# EAGLE board bbb-cc2520_b (EAGLE 6.6.0)
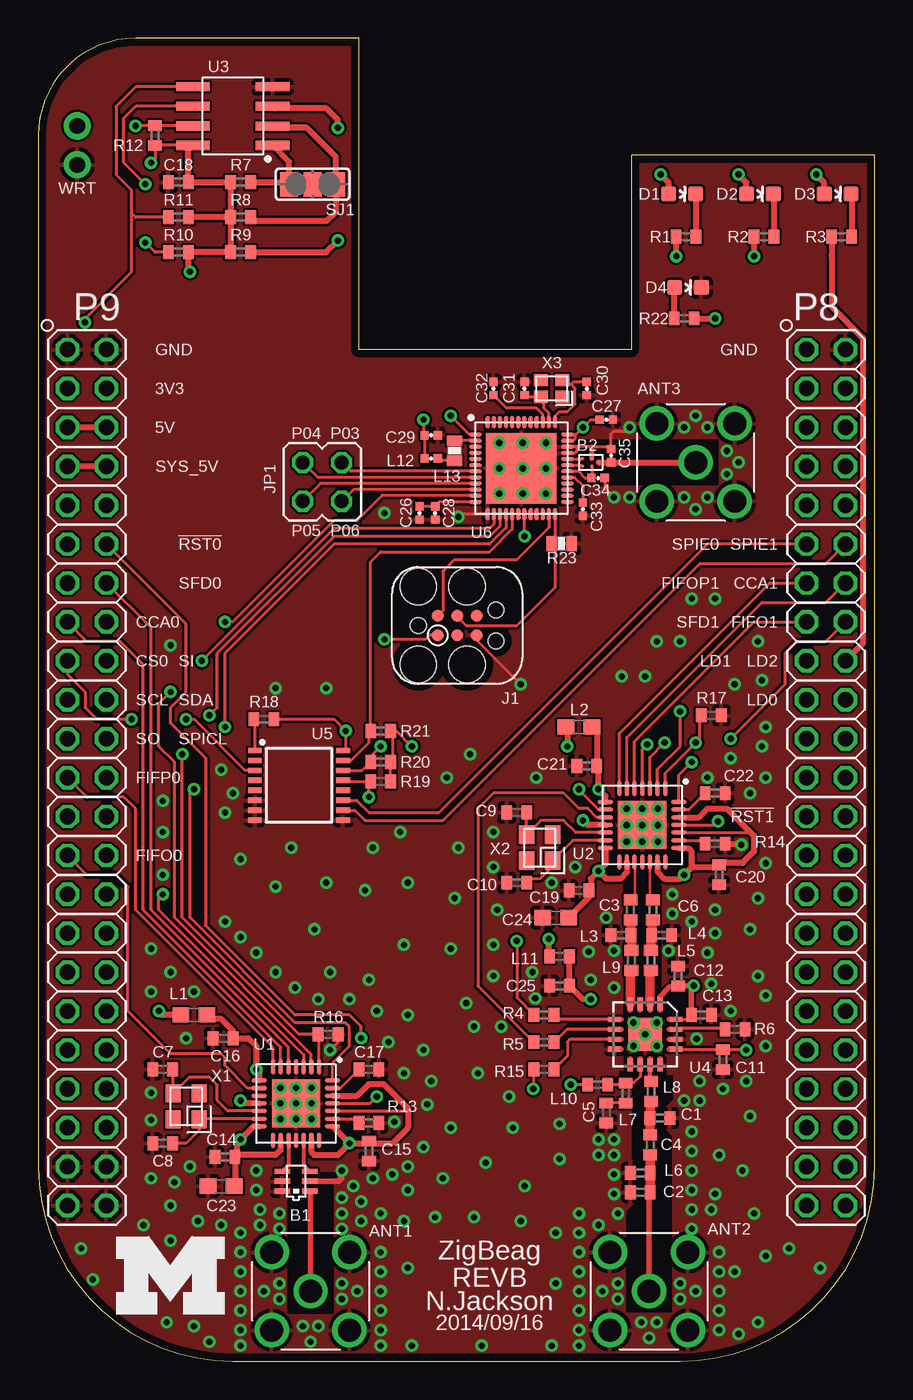
[diagram p0: board, top side]
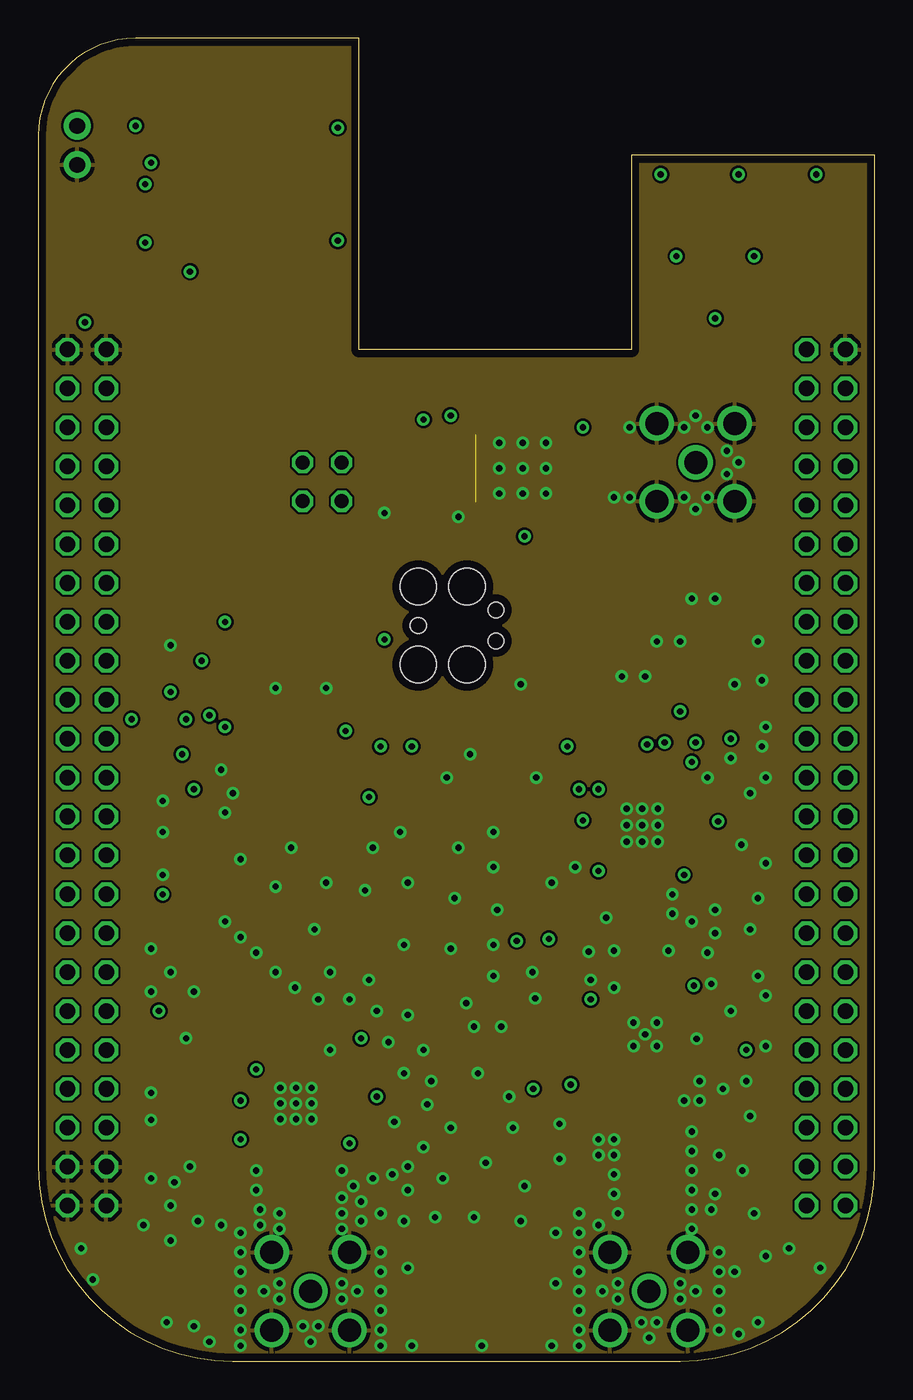
[diagram p1: board, inner layer GND]
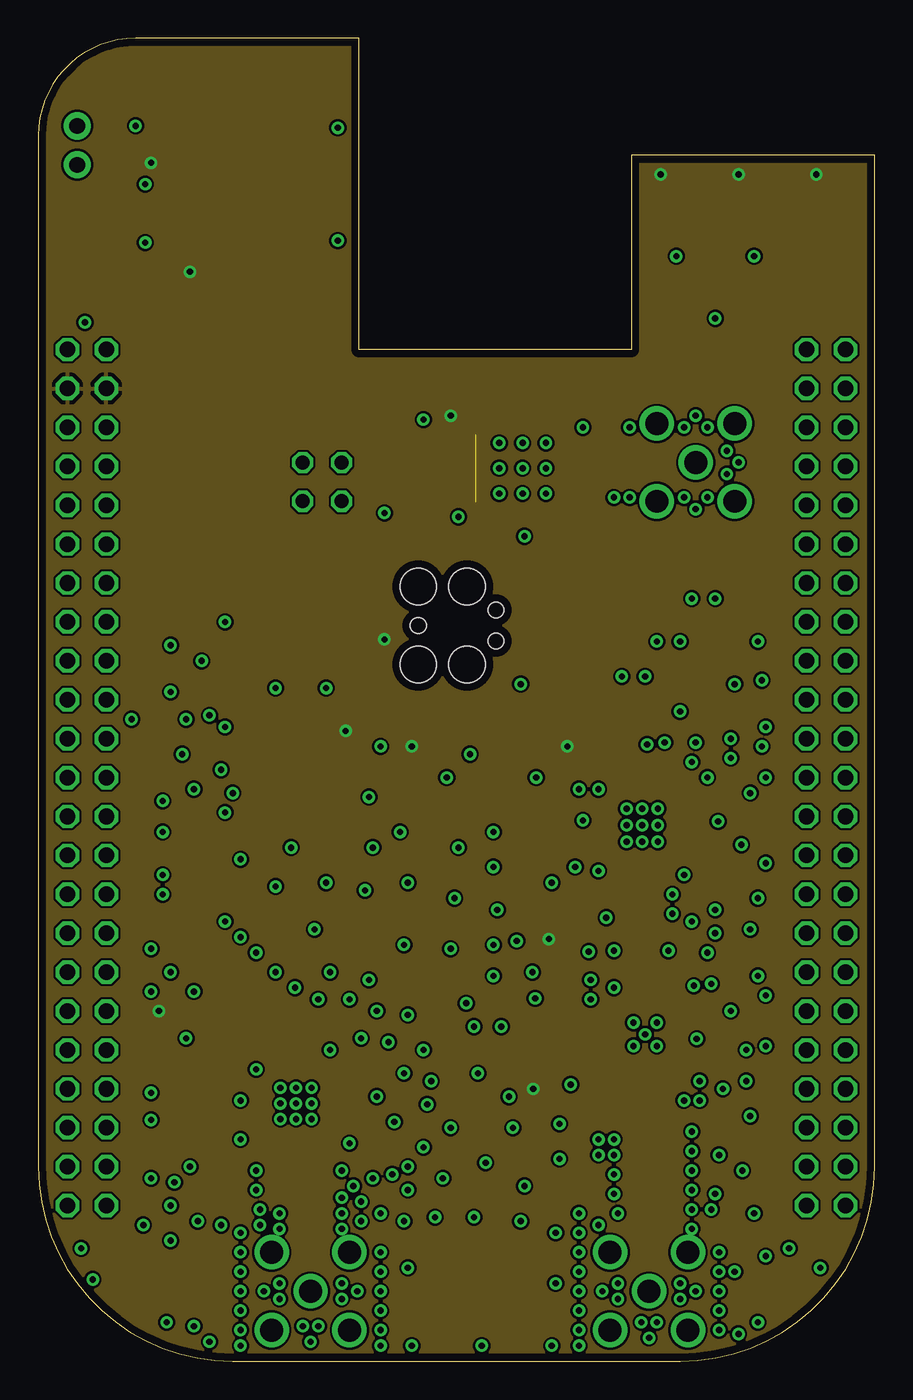
[diagram p2: board, inner layer VCC]
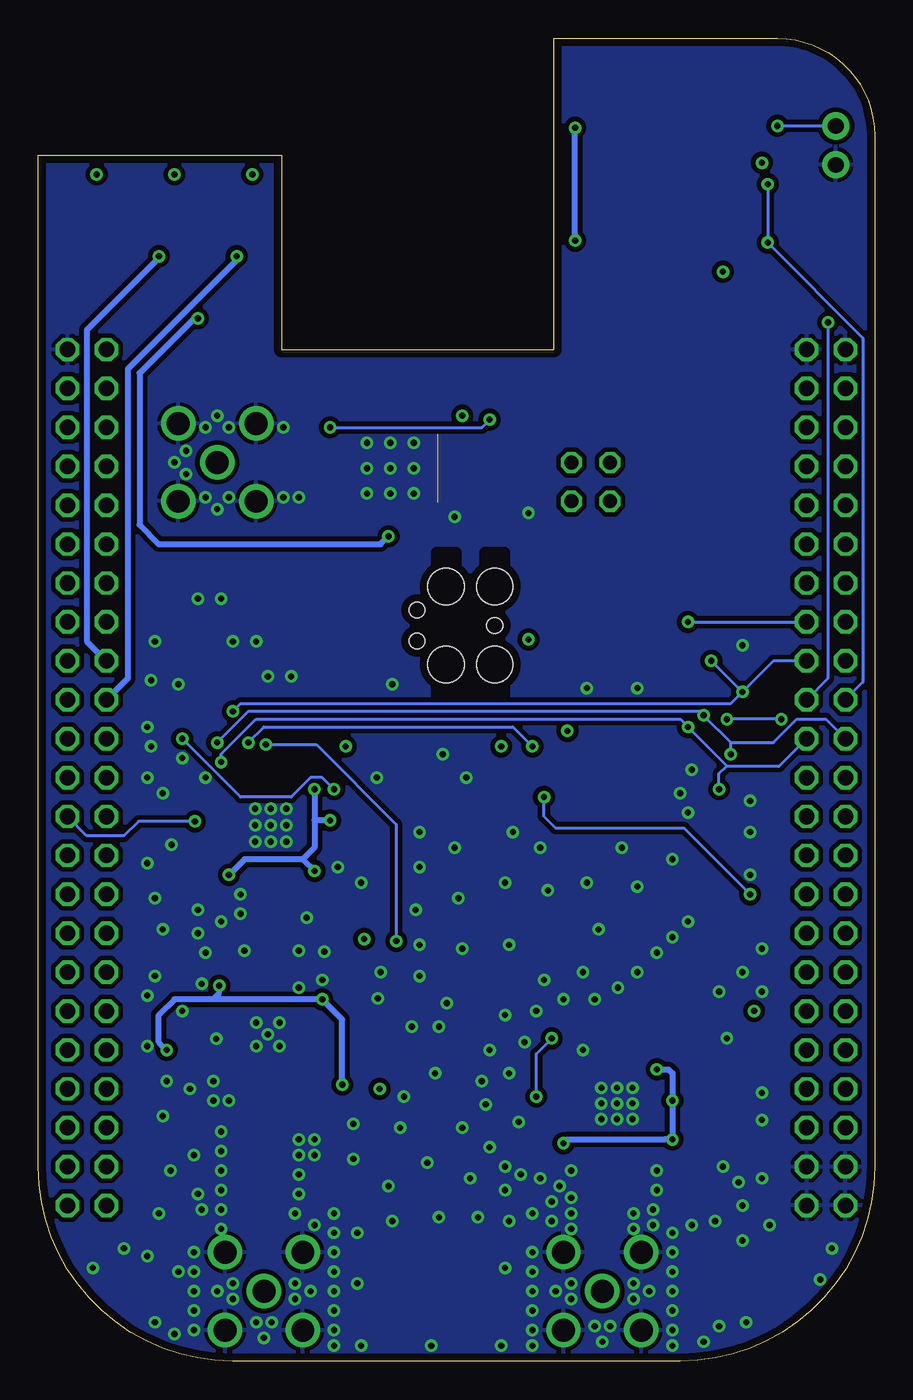
[diagram p3: board, bottom side, seen from below]

Size 54.61 x 86.36 mm. Coordinates in mm from the lower left corner, seen from the top.
Outline: 20.95,86.36 6.35,86.36 arc90 0,80.01 0,12.7 arc90 12.7,0 41.91,0 arc90 54.61,12.7 54.61,78.74 38.73,78.74 38.73,66.04 20.95,66.04 20.95,86.36
Copper layers (1+2*15+16): Top 0.0178mm / dielectric 12mil / GND 0.0356mm / dielectric 28mil / VCC 0.0356mm / dielectric 12mil / Bottom 0.0178mm
Design rules "sunstone-4lyr_v1.0.0.3 *": minimum track width 6mil, minimum drill 8mil, track to track 6mil, track to pad 6mil, pad to pad 6mil, via to via 6mil, smd to smd 6mil, copper to edge 20mil, drill to drill 16mil, minimum pad ring 8mil, minimum via ring 8mil, stop-mask expansion 3mil, vias tented up to drill 25mil, thermal gap 10mil

## Footprints (pad centres in the part's own frame; a part is rotated, then mirrored left to right if it is on the bottom)
MOLEX_WM5544-ND = drill 1.499: GND1 0,5.08; GND2 5.08,5.08; GND3 0,0; GND4 5.08,0; SIGNAL 2.54,2.54
2450BM = smd 0.35 x 1: 1 0.65,0.9; 2 0,0.9; 3 -0.65,0.9; 4 -0.65,-0.9; 5 0,-0.9; 6 0.65,-0.9
BAL-NRF01D3 = smd 0.22 x 0.22: ANT1 -0.537,-0.25; ANT2 -0.537,0.25; GND 0.069,0.25; SE 0.537,0; VCC 0.069,-0.25
C0402 = smd 0.7 x 0.9: 1 -0.65,0; 2 0.65,0
C0603 = smd 1.1 x 1: 1 -0.85,0; 2 0.85,0
0402_CAP = smd 0.536 x 0.546: 1 -0.433,0; 2 0.433,0
LED-0603 = smd 1 x 1: A 0,-0.877; C 0,0.877
TC2030-IDC = smd 0.787 x 0.787: 1 -1.27,-0.635; 2 -1.27,0.635; 3 0,-0.635; 4 0,0.635; 5 1.27,-0.635; 6 1.27,0.635 | hole 2.375: -2.54,2.54; 0.635,2.54; 0.635,-2.54; -2.54,-2.54 | hole 1.016: -2.54,0; 2.54,1.016; 2.54,-1.016
JP2Q = drill 0.914 octagon: 1 -1.27,-1.27; 2 1.27,-1.27; 3 -1.27,1.27; 4 1.27,1.27
0603 = smd 1.1 x 1: 1 -0.85,0; 2 0.85,0
0603_CAP = smd 0.7 x 1: 1 -0.65,0; 2 0.65,0
BBB_HEADERS = drill 1.016 octagon: P8_1 49.53,57.15; P8_2 52.07,57.15; P8_3 49.53,54.61; P8_4 52.07,54.61; P8_5 49.53,52.07; P8_6 52.07,52.07; P8_7 49.53,49.53; P8_8 52.07,49.53; P8_9 49.53,46.99; P8_10 52.07,46.99; P8_11 49.53,44.45; P8_12 52.07,44.45; P8_13 49.53,41.91; P8_14 52.07,41.91; P8_15 49.53,39.37; P8_16 52.07,39.37; P8_17 49.53,36.83; P8_18 52.07,36.83; P8_19 49.53,34.29; P8_20 52.07,34.29; P8_21 49.53,31.75; P8_22 52.07,31.75; P8_23 49.53,29.21; P8_24 52.07,29.21; P8_25 49.53,26.67; P8_26 52.07,26.67; P8_27 49.53,24.13; P8_28 52.07,24.13; P8_29 49.53,21.59; P8_30 52.07,21.59; P8_31 49.53,19.05; P8_32 52.07,19.05; P8_33 49.53,16.51; P8_34 52.07,16.51; P8_35 49.53,13.97; P8_36 52.07,13.97; P8_37 49.53,11.43; P8_38 52.07,11.43; P8_39 49.53,8.89; P8_40 52.07,8.89; P8_41 49.53,6.35; P8_42 52.07,6.35; P8_43 49.53,3.81; P8_44 52.07,3.81; P8_45 49.53,1.27; P8_46 52.07,1.27; P9_1 1.27,57.15; P9_2 3.81,57.15; P9_3 1.27,54.61; P9_4 3.81,54.61; P9_5 1.27,52.07; P9_6 3.81,52.07; P9_7 1.27,49.53; P9_8 3.81,49.53; P9_9 1.27,46.99; P9_10 3.81,46.99; P9_11 1.27,44.45; P9_12 3.81,44.45; P9_13 1.27,41.91; P9_14 3.81,41.91; P9_15 1.27,39.37; P9_16 3.81,39.37; P9_17 1.27,36.83; P9_18 3.81,36.83; P9_19 1.27,34.29; P9_20 3.81,34.29; P9_21 1.27,31.75; P9_22 3.81,31.75; P9_23 1.27,29.21; P9_24 3.81,29.21; P9_25 1.27,26.67; P9_26 3.81,26.67; P9_27 1.27,24.13; P9_28 3.81,24.13; P9_29 1.27,21.59; P9_30 3.81,21.59; P9_31 1.27,19.05; P9_32 3.81,19.05; P9_33 1.27,16.51; P9_34 3.81,16.51; P9_35 1.27,13.97; P9_36 3.81,13.97; P9_37 1.27,11.43; P9_38 3.81,11.43; P9_39 1.27,8.89; P9_40 3.81,8.89; P9_41 1.27,6.35; P9_42 3.81,6.35; P9_43 1.27,3.81; P9_44 3.81,3.81; P9_45 1.27,1.27; P9_46 3.81,1.27
R0402 = smd 0.7 x 0.9: 1 -0.65,0; 2 0.65,0
0603-RES = smd 0.7 x 1: 1 -0.65,0; 2 0.65,0
PAD-JUMPER-3-NO_YES_SILK_FULL_BOX = smd 1.168 x 1.6: 1 -1.524,0; 2 0,0; 3 1.524,0
S-PVQFN-N28 = smd 1 x 0.28: 1 -2.4,1.5; 2 -2.4,1; 3 -2.4,0.5; 4 -2.4,0; 5 -2.4,-0.5; 6 -2.4,-1; 7 -2.4,-1.5; 15 2.4,-1.5; 16 2.4,-1; 17 2.4,-0.5; 18 2.4,0; 19 2.4,0.5; 20 2.4,1; 21 2.4,1.5 | smd 0.28 x 1: 8 -1.5,-2.4; 9 -1,-2.4; 10 -0.5,-2.4; 11 0,-2.4; 12 0.5,-2.4; 13 1,-2.4; 14 1.5,-2.4; 22 1.5,2.4; 23 1,2.4; 24 0.5,2.4; 25 0,2.4; 26 -0.5,2.4; 27 -1,2.4; 28 -1.5,2.4 | smd 3.15 x 3.15: THERMALPAD 0,0
CAT24C256WI-GT3 = smd 2.2 x 0.6: A0 -2.6,1.91; A1 -2.6,0.65; A2 -2.6,-0.64; SCL 2.6,-0.64; SDA 2.6,-1.91; VCC 2.6,1.91; VSS -2.6,-1.91; WP 2.6,0.64
PVQFN-16 = smd 0.35 x 0.825: 1 -0.975,-2.013; 2 -0.325,-2.013; 3 0.325,-2.013; 4 0.975,-2.013; 9 0.975,2.013; 10 0.325,2.013; 11 -0.325,2.013; 12 -0.975,2.013 | smd 0.825 x 0.35: 5 2.013,-0.975; 6 2.013,-0.325; 7 2.013,0.325; 8 2.013,0.975; 13 -2.013,0.975; 14 -2.013,0.325; 15 -2.013,-0.325; 16 -2.013,-0.975 | smd 2.16 x 2.16: PAD 0,0
TSSOP16 = smd 0.9 x 0.35: 1 -2.875,2.275; 2 -2.875,1.625; 3 -2.875,0.975; 4 -2.875,0.325; 5 -2.875,-0.325; 6 -2.875,-0.975; 7 -2.875,-1.625; 8 -2.875,-2.275; 9 2.875,-2.275; 10 2.875,-1.625; 11 2.875,-0.975; 12 2.875,-0.325; 13 2.875,0.325; 14 2.875,0.975; 15 2.875,1.625; 16 2.875,2.275
QFN-48-6MM = smd 0.8 x 0.25: 1 -3,2.2; 2 -3,1.8; 3 -3,1.4; 4 -3,1; 5 -3,0.6; 6 -3,0.2; 7 -3,-0.2; 8 -3,-0.6; 9 -3,-1; 10 -3,-1.4; 11 -3,-1.8; 12 -3,-2.2; 25 3,-2.2; 26 3,-1.8; 27 3,-1.4; 28 3,-1; 29 3,-0.6; 30 3,-0.2; 31 3,0.2; 32 3,0.6; 33 3,1; 34 3,1.4; 35 3,1.8; 36 3,2.2 | smd 0.25 x 0.8: 13 -2.2,-3; 14 -1.8,-3; 15 -1.4,-3; 16 -1,-3; 17 -0.6,-3; 18 -0.2,-3; 19 0.2,-3; 20 0.6,-3; 21 1,-3; 22 1.4,-3; 23 1.8,-3; 24 2.2,-3; 37 2.2,3; 38 1.8,3; 39 1.4,3; 40 1,3; 41 0.6,3; 42 0.2,3; 43 -0.2,3; 44 -0.6,3; 45 -1,3; 46 -1.4,3; 47 -1.8,3; 48 -2.2,3 | smd 4.6 x 4.6: GND 0,0
PTH-JUMPER-2-NO_NO_SILK = drill 1.016 pad 1.778: 1 -1.27,0; 2 1.27,0
NX2520SA = smd 1.2 x 1: 1 -0.85,-0.85; 2 0.85,-0.85; 3 0.85,0.85; 4 -0.85,0.85
TXC-8Y = smd 0.9 x 0.8: 1 -0.7,-0.55; 2 0.7,-0.55; 3 0.7,0.55; 4 -0.7,0.55

## Placement (x,y rotation side)
ANT1  MOLEX_WM5544-ND  [MOLEX_WM5544-ND]  15.24,2.03 0 top
ANT2  MOLEX_WM5544-ND  [MOLEX_WM5544-ND]  37.34,2.03 0 top
ANT3  MOLEX_WM5544-ND  [MOLEX_WM5544-ND]  40.39,56.13 0 top
B1  2450BM15A0002  [2450BM]  16.83,11.75 270 top
B2  BAL-NRF01D3  [BAL-NRF01D3]  36.07,58.67 0 top
C1  1pF  [C0402]  40.59,15.88 0 top
C2  2.7pF  [C0402]  39.31,11.02 180 top
C3  3pF  [C0402]  38.67,29.46 270 top
C4  6.8pF  [C0402]  39.95,14.12 90 top
C5  15pF  [C0402]  37.08,16.21 270 top
C6  3.9pF  [C0402]  40.13,29.46 270 top
C7  27pF  [C0402]  8.13,19.05 180 top
C8  27pF  [C0402]  8.13,14.22 180 top
C9  27pF  [C0402]  31.24,35.81 180 top
C10  27pF  [C0402]  31.24,31.24 180 top
C11  1nF  [C0402]  44.7,19.68 270 top
C12  1nF  [C0402]  41.77,25.15 90 top
C13  1nF  [C0402]  43.31,22.61 0 top
C14  100nF  [C0402]  12.19,13.34 180 top
C15  100nF  [C0402]  21.59,13.72 270 top
C16  100nF  [C0402]  12.06,21.08 180 top
C17  100nF  [C0402]  21.59,19.05 0 top
C18  100nF  [C0402]  9.14,76.96 180 top
C19  100nF  [C0402]  35.31,30.73 180 top
C20  100nF  [C0402]  44.45,31.75 270 top
C21  100nF  [C0402]  35.81,38.86 180 top
C22  100nF  [C0402]  44.2,37.08 0 top
C23  1uF  [C0603]  11.94,11.43 180 top
C24  1uF  [C0603]  33.78,28.96 180 top
C25  2.2uF  [C0402]  34.04,24.51 180 top
C26  0.1uF  [0402_CAP]  24.89,55.37 270 top
C27  1nF  [0402_CAP]  37.08,61.47 0 top
C28  4.7uF  [0402_CAP]  25.91,55.37 270 top
C29  1uF  [0402_CAP]  25.65,60.45 0 top
C30  12pF  [0402_CAP]  35.81,63.5 270 top
C31  12pF  [0402_CAP]  31.75,63.5 90 top
C32  1nF  [0402_CAP]  29.72,63.5 90 top
C33  47nF  [0402_CAP]  35.56,55.63 270 top
C34  2.2nF  [0402_CAP]  36.55,57.66 0 top
C35  0.8pF  [0402_CAP]  37.4,59.11 90 top
D1  [LED-0603]  42.04,76.2 270 top
D2  [LED-0603]  47.12,76.2 270 top
D3  [LED-0603]  52.2,76.2 270 top
D4  BLUE  [LED-0603]  42.42,70.1 270 top
J1  TC2030-IDC  [TC2030-IDC]  27.35,48.03 0 top
JP1  [JP2Q]  18.54,57.4 180 top
L1  [0603]  10.16,22.61 180 top
L2  [0603]  35.31,41.4 180 top
L3  1nH  [C0402]  38.04,27.81 0 top
L4  1nH  [C0402]  40.7,27.81 180 top
L5  1nH  [C0402]  40.01,26.16 90 top
L6  1nH  [C0402]  39.31,12.29 180 top
L7  1.1nH  [C0402]  38.35,17.5 270 top
L8  1.5nH  [C0402]  40.02,17.61 90 top
L9  2nH  [C0402]  38.73,26.16 90 top
L10  5.1nH  [C0402]  36.53,18.06 180 top
L11  1kOhm  [C0402]  34.04,26.42 0 top
L12  [0402_CAP]  25.65,58.93 0 top
L13  10uH  [0603_CAP]  27.18,59.44 90 top
P9/P8  BBB_HEADERS  [BBB_HEADERS]  0.64,8.89 0 top
R1  470  [R0402]  42.29,73.41 0 top
R2  470  [R0402]  47.37,73.41 0 top
R3  470  [R0402]  52.45,73.41 0 top
R4  1k 1%  [R0402]  33.02,22.61 180 top
R5  1k 1%  [R0402]  33.02,20.83 180 top
R6  4.3k  [R0402]  45.49,21.67 180 top
R7  4.75k  [R0402]  13.21,76.96 180 top
R8  4.75k  [R0402]  13.21,74.68 180 top
R9  4.75k  [R0402]  13.21,72.39 180 top
R10  5.6k 5%  [R0402]  9.14,72.39 0 top
R11  5.6k 5%  [R0402]  9.14,74.68 0 top
R12  10k 1%  [R0402]  7.62,80.01 90 top
R13  56k 1%  [R0402]  21.59,15.56 180 top
R14  56k 1%  [R0402]  44.2,33.78 180 top
R15  330k 1%  [R0402]  33.02,19.05 180 top
R16  1M 1%  [R0402]  18.92,21.34 180 top
R17  1M 1%  [R0402]  43.94,42.16 180 top
R18  10k 1%  [R0402]  14.73,41.91 0 top
R19  10k 1%  [R0402]  22.35,37.85 0 top
R20  10k 1%  [R0402]  22.35,39.12 0 top
R21  10k 1%  [R0402]  22.35,41.15 0 top
R22  470  [R0402]  42.16,68.07 0 top
R23  12k  [0603-RES]  34.17,53.38 0 top
SJ1  JUMPER-PAD-3-NOFULL_BOX_SILK  [PAD-JUMPER-3-NO_YES_SILK_FULL_BOX]  17.91,76.83 0 top
U1  CC2520  [S-PVQFN-N28]  16.83,16.83 270 top
U2  CC2520  [S-PVQFN-N28]  39.43,35 270 top
U3  CAT24C256WI-GT3  [CAT24C256WI-GT3]  12.7,81.28 180 top
U4  CC2591  [PVQFN-16]  39.62,21.34 180 top
U5  CD4051B-53B  [TSSOP16]  17.02,37.59 0 top
U6  NRF51822QF  [QFN-48-6MM]  31.54,58.29 0 top
U$2  [UMICH_SOLID_200MIL]  5.08,3.05 0 top
WRT  JUMPER-PTH-2-NO  [PTH-JUMPER-2-NO_NO_SILK]  2.54,79.38 270 top
X1  NX2520SA  [NX2520SA]  9.65,16.64 90 top
X2  NX2520SA  [NX2520SA]  32.73,33.53 90 top
X3  16MHz  [TXC-8Y]  33.53,63.5 180 top

## Library data of the parts
ANT1-ANT3 = connector; DIGIKEY: WM5544-ND
B1 = rpi-cc2520; DIGIKEY: 712-1536-1-ND
B2 = chips; DIGIKEY: 497-13637-1-ND; MOUSER: 511-BAL-NRF01D3
C1-C6 C11-C22 C25 = rcl; DIGIKEY: 490-1318-1-ND
C7-C10 = rcl; DIGIKEY: 490-5869-1-ND
C23 C24 = rcl; DIGIKEY: 490-1550-1-ND
C26 = passives; DIGIKEY: 445-4952-1-ND
C27 C32 = passives; DIGIKEY: 490-1303-1-ND
C28 = passives; DIGIKEY: 445-5947-1-ND
C29 = passives; DIGIKEY: 1276-1513-1-ND
C30 C31 = passives; DIGIKEY: 490-6197-1-ND
C33 = passives; DIGIKEY: 445-1264-1-ND
C34 C35 = passives; DIGIKEY: 490-5419-1-ND
D1 = SparkFun-LED; DIGIKEY: 160-1834-1-ND
D2 = SparkFun-LED; DIGIKEY: 160-1835-1-ND
D3 = SparkFun-LED; DIGIKEY: 160-1837-1-ND
D4 = SparkFun-LED
J1 = connector; TAGCONNECT: TC2030-IDC
JP1 = jumper
L1 L2 = SparkFun-Passives; DIGIKEY: 490-1015-1-ND
L3-L11 SJ1 WRT = SparkFun-Passives
L12 = passives; DIGIKEY: 587-1521-1-ND
L13 = passives; DIGIKEY: 490-4025-1-ND
P9/P8 U3 U4 = bbb-cc2520
R1-R3 R22 = rcl; DIGIKEY: RHM470JCT-ND
R4-R6 R13-R15 = rcl; DIGIKEY: P56.0KLCT-ND
R7-R12 R16-R21 = rcl; DIGIKEY: RHM1.00MCDCT-ND
R23 = passives; DIGIKEY: RHM12.0KCDCT-ND
U1 U2 = chips; DIGIKEY: 296-22996-1-ND
U5 = bbb-cc2520; DIGIKEY: 296-11993-1-ND
U6 = chips; DIGIKEY: 1490-1032-1-ND; MOUSER: 949-NRF51822-QFAB-R7
U$2 = logos
X1 X2 = rpi-cc2520; DIGIKEY: 644-1065-1-ND
X3 = crystals; DIGIKEY: 887-2003-1-ND

## Nets
5V: P9/P8.P9_7 P9/P8.P9_8
!RESET0: P9/P8.P9_12 U1.25
!RESET1: P9/P8.P8_26 U2.25
A0: U6.45
A1: U6.46
AVDD: C27.1 C29.1 L12.1 U6.35 U6.36
BIRQ: P9/P8.P9_16 U6.11
CC_GPIO0_0: U1.10
CC_GPIO5_0: U1.4
CCA0: P9/P8.P9_15 U1.6
CCA1: P9/P8.P8_14 U2.6
CS: P9/P8.P9_17 U5.3
CS0: R19.1 U1.3 U5.13
CS1: R20.1 U2.3 U5.14
CS2: R21.1 U5.15 U6.17
CS3: U5.12
CS4: R18.1 U5.1
CS5: U5.5
CS6: U5.2
CS7: U5.4
DCC: L13.2 U6.2
EN: R5.2 U2.10
FIFO0: P9/P8.P9_27 U1.9
FIFO1: P9/P8.P8_16 U2.9
FIFOP0: P9/P8.P9_23 U1.7
FIFOP1: P9/P8.P8_13 U2.7
GND: ANT1.GND1 ANT1.GND2 ANT1.GND3 ANT1.GND4 ANT2.GND1 ANT2.GND2 ANT2.GND3 ANT2.GND4 ANT3.GND1 ANT3.GND2 ANT3.GND3 ANT3.GND4 B1.2 B1.5 B1.6 B2.GND C1.2 C2.2 C5.2 C7.2 C8.2 C9.2 C10.2 C11.2 C12.2 C13.2 C14.2 C15.2 C16.2 C17.2 C18.2 C19.2 C20.2 C21.2 C22.2 C23.2 C24.2 C25.2 C26.2 C27.2 C28.2 C29.2 C30.2 C31.2 C32.2 C33.2 C34.2 C35.2 D4.C J1.5 L3.1 L4.1 L6.2 P9/P8.P8_2 P9/P8.P9_1 P9/P8.P9_2 P9/P8.P9_43 P9/P8.P9_44 P9/P8.P9_45 P9/P8.P9_46 R6.1 R13.1 R14.1 R16.1 R17.1 R23.2 SJ1.2 U1.THERMALPAD U2.THERMALPAD U3.VSS U4.8 U4.9 U4.12 U4.14 U4.PAD U5.6 U5.7 U5.8 U5.9 U6.13 U6.33 U6.34 U6.GND WRT.2
LED0: P9/P8.P8_19 R1.1
LED1: P9/P8.P8_17 R2.1
LED2: P9/P8.P8_18 R3.1
MISO: P9/P8.P9_21 R16.2 R17.2 U1.1 U2.1 U6.15
MOSI: P9/P8.P9_18 U1.2 U2.2 U6.14
N$1: D1.C R1.2
N$2: D2.C R2.2
N$3: D3.C R3.2
N$5: C14.1 C15.1 C16.1 C23.1 L1.1 U1.8 U1.11 U1.14 U1.16 U1.20 U1.22 U1.24 U1.26
N$7: ANT1.SIGNAL B1.1
N$11: C8.1 U1.13 X1.1
N$12: C17.1 U1.27
N$13: C7.1 U1.12 X1.3
N$14: R13.2 U1.23
N$29: R7.1 SJ1.1 U3.A0
N$30: R8.1 SJ1.3 U3.A1
N$31: R12.2 U3.WP WRT.1
N$32: R9.1 U3.A2
N$36: B2.ANT1 U6.31
N$37: B2.ANT2 U6.32
N$38: ANT3.SIGNAL B2.SE C35.1
N$39: L12.2 L13.1
N$40: C30.1 U6.37 X3.1
N$41: C31.1 U6.38 X3.3
N$42: C32.1 U6.39
N$43: C33.1 U6.29
N$44: L9.1 U4.4
N$45: L5.1 U4.2
N$46: C6.2 L4.2 L5.2
N$47: C3.2 L3.2 L9.2
N$48: L7.1 L10.1 U4.10
N$49: C11.1 C12.1 C13.1 C25.1 L10.2 L11.2 U4.1 U4.13 U4.16
N$50: C5.1 L7.2
N$51: L8.2 U4.11
N$52: ANT2.SIGNAL C2.1 C4.1 L6.1
N$53: C1.1 C4.2 L8.1
N$54: R6.2 U4.15
N$55: R4.1 U4.5
N$56: R5.1 U4.6
N$57: C19.1 C20.1 C21.1 C24.1 L2.1 U2.8 U2.11 U2.14 U2.16 U2.20 U2.22 U2.24 U2.26
N$58: C22.1 U2.27
N$59: C10.1 U2.13 X2.1
N$60: C9.1 U2.12 X2.3
N$61: R14.2 U2.23
N$62: R15.1 U4.7
N$63: D4.A R22.1
N$64: R22.2 U6.19
P03: JP1.1 U6.7
P04: JP1.2 U6.8
P05: JP1.4 U6.9
P06: JP1.3 U6.10
P12: U6.18
P24: U6.43
P25: U6.44
PAEN: R4.2 U2.4
PROG_RX: U6.47
PROG_TX: U6.48
RF_N: B1.3 U1.19
RF_N2: C6.1 U2.19
RF_P: B1.4 U1.17
RF_P2: C3.1 U2.17
SCL: P9/P8.P9_19 R10.1 U3.SCL
SCLK: P9/P8.P9_22 U1.28 U2.28 U6.16
SDA: P9/P8.P9_20 R11.1 U3.SDA
SFD0: P9/P8.P9_14 U1.5
SFD1: P9/P8.P8_15 U2.5
SPIE0: P9/P8.P8_11 U5.11
SPIE1: P9/P8.P8_12 U5.10
SWDCLK: J1.4 R23.1 U6.24
SWDIO: J1.2 U6.23
VCC: C18.1 C26.1 C28.1 D1.A D2.A D3.A J1.1 L1.2 L2.2 L11.1 P9/P8.P9_3 P9/P8.P9_4 R7.2 R8.2 R9.2 R10.2 R11.2 R12.1 R15.2 R18.2 R19.2 R20.2 R21.2 U3.VCC U5.16 U6.1 U6.12
VDD: P9/P8.P9_5 P9/P8.P9_6
VDD_PA: B2.VCC C34.1 U6.30

## Tracks (layer width: path | path; a pad name or v marks a point on that pad's centre or on a via)
5V
  Top 0.406: P9/P8.P9_7 P9/P8.P9_8
!RESET0  (via drill 0.41)
  Top 0.203: v22.1,17.27 21.65,16.83 U1.25 | v21.08,21.08 21.08,21.84 20.32,22.61 16.76,22.61 10.92,28.45 10.92,39.37 8.64,41.66 8.64,42.67 9.65,43.69 9.65,48.13 P9/P8.P9_12
  Bottom 0.203: v22.1,17.27 22.1,20.07 v21.08,21.08
!RESET1  (via drill 0.41)
  Top 0.203: U2.25 44.15,35 v44.39,35.24
  Bottom 0.203: v44.39,35.24 48.07,35.24 49.02,34.29 51.44,34.29 P9/P8.P8_26
AVDD  (via drill 0.41)
  Top 0.203: C27.1 36.07,61.47 v35.56,60.96 35.09,60.49 | 35.05,60.45 35.05,60.2 34.95,60.09 U6.35 | 35.09,60.49 U6.36 35.01,60.49 35.05,60.45 | 35.05,60.45 35.09,60.49 | v25.15,61.47 25.15,60.53 C29.1 L12.1
  Bottom 0.203: v35.56,60.96 25.65,60.96 v25.15,61.47
BIRQ  (via drill 0.41)
  Top 0.203: v12.19,48.26 12.7,48.26 19.3,54.86 20.83,54.86 22.46,56.49 U6.11
  Bottom 0.203: v12.19,48.26 P9/P8.P9_16
CCA0
  Top 0.203: U1.6 15.83,20.49 6.86,29.46 6.86,45.47 5.33,46.99 3.17,46.99 P9/P8.P9_15
CCA1
  Top 0.203: U2.6 38.43,40.72 47.24,49.53 51.44,49.53 P9/P8.P8_14
CS  (via drill 0.41)
  Top 0.203: P9/P8.P9_17 1.91,44.83 3.05,43.69 3.05,42.67 3.81,41.91 v6.1,41.91 | v9.65,41.91 10.16,41.91 13.46,38.61 14.1,38.61 U5.3
  Bottom 0.203: v6.1,41.91 v9.65,41.91
CS0  (via drill 0.41)
  Top 0.203: U1.3 17.33,20.01 7.87,29.46 7.87,30.23 v8.13,30.48 | U5.13 19.96,37.85 R19.1 21.59,37.73 v21.59,36.83
  Bottom 0.203: v21.59,36.83 21.59,35.56 20.83,34.8 12.45,34.8 v8.13,30.48
CS1  (via drill 0.41)
  Top 0.203: U2.3 39.93,39.42 v40.89,40.39 | U5.14 21.15,38.57 R20.1 21.84,39.26 21.84,39.62 v22.35,40.13
  Bottom 0.203: v40.89,40.39 39.88,41.4 23.62,41.4 v22.35,40.13
CS2
  Top 0.203: U6.17 30.94,54.31 29.46,52.83 22.35,52.83 21.7,52.18 R21.1 21.59,41.04 21.59,40.39 20.42,39.22 U5.15
CS4
  Top 0.203: U5.1 14.14,41.85 R18.1
DCC
  Top 0.203: U6.2 L13.2
EN
  Top 0.203: R5.2 28.7,24.5 28.7,36.07 29.72,37.08 34.29,37.08 35.31,36.07 35.88,36.07 36.44,35.5 U2.10
FIFO0
  Top 0.203: U1.9 13.67,17.83 12.19,19.3 12.19,19.81 11.94,20.07 8.64,20.07 5.84,22.86 5.84,30.99 5.08,31.75 3.17,31.75 P9/P8.P9_27
FIFO1  (via drill 0.41)
  Top 0.203: U2.9 36.58,36 35.31,37.27 v35.31,37.34 | P9/P8.P8_16 51.44,46.99 49.53,46.99 48.77,46.23 48.77,44.2 v45.21,40.64
  Bottom 0.203: v35.31,37.34 36.07,38.1 36.83,38.1 38.1,36.83 41.4,36.83 v45.21,40.64
FIFOP0
  Top 0.203: U1.7 15.33,20.49 6.35,29.46 6.35,36.07 5.59,36.83 3.17,36.83 P9/P8.P9_23
FIFOP1
  Top 0.203: P9/P8.P8_13 47.75,50.8 37.93,40.98 U2.7
GND  (via drill 0.41)
  Top 0.203: R16.1 19.57,20.84 v19.05,20.32 | 34.65,59.29 U6.33 35.04,59.29 35.18,59.44 35.18,59.56 35.05,59.69 U6.34 36.14,59.69 37.25,59.69 C35.2 37.4,60.52 37.59,60.71 38.35,60.71 v38.61,60.96 | C34.2 36.99,56.99 v37.59,56.39 | U6.13 27.61,55.29 v27.43,55.12 | J1.5 28.62,47.07 v31.5,44.2 | U5.9 19.95,35.32
  Top 0.305: 36.13,59.29 36.13,58.93 B2.GND 36.14,59.69
  Top 0.356: B1.2 19.62,11.75 19.81,11.94 v19.81,12.45
  Top 0.406: U4.PAD 39.62,22.1 | R14.1 45.85,33.78 v45.91,33.72
  other vias: 23.24,15.62 42.99,21.04 9.65,21.08 10.16,24.13 7.37,24.13 8.64,25.4 7.37,26.92 9.91,12.7 8.89,11.68 7.37,11.94 7.37,15.75 7.37,17.53 10.41,9.14 8.64,10.16 13.21,7.11 15.75,9.65 15.75,8.64 19.81,9.65 19.81,10.67 19.81,8.64 19.81,5.08 19.81,4.06 17.27,2.29 18.29,2.29 15.75,5.08 15.75,4.06 14.73,4.57 17.78,1.27 20.83,4.57 14.22,12.45 14.22,11.18 14.48,8.89 13.21,8.38 13.21,5.84 13.21,4.57 13.21,3.3 13.21,2.03 13.21,1.02 22.35,1.02 22.35,2.03 22.35,3.3 22.35,4.57 22.35,5.84 22.35,7.11 14.48,9.91 21.08,9.14 22.35,9.65 21.84,11.94 21.08,10.41 20.57,11.43 8.38,2.54 3.56,5.33 2.79,7.37 11.18,1.27 8.13,31.75 12.19,28.7 13.21,27.69 14.22,26.67 15.49,25.4 16.76,24.38 18.29,23.62 20.32,23.62 22.1,22.86 22.86,20.83 23.88,18.8 25.4,16.76 25.15,13.97 24.13,12.7 19.05,25.4 21.59,24.89 24.13,22.61 25.15,20.32 25.65,18.29 26.92,15.24 26.42,11.94 24.13,11.18 23.11,12.19 11.94,8.89 6.86,8.89 12.19,35.81 8.13,36.58 16.51,33.53 8.13,34.54 31.75,11.43 28.45,9.4 33.78,8.38 23.88,9.14 33.78,5.08 24.38,1.02 33.53,1.02 35.31,1.02 35.31,2.03 35.31,4.57 35.31,5.84 35.31,7.11 35.31,8.38 37.85,9.65 43.94,9.91 37.85,5.08 37.85,4.06 36.83,4.57 39.37,2.54 40.39,2.54 39.88,1.52 42.67,8.64 42.93,4.57 41.91,5.08 41.91,4.06 44.45,4.57 44.45,5.84 44.45,7.11 44.45,3.3 44.45,2.03 35.31,3.3 42.67,9.91 42.67,11.18 42.67,12.45 42.67,13.72 42.67,14.99 42.16,17.02 43.18,17.02 43.18,18.29 37.59,10.92 37.59,12.19 37.59,13.46 37.59,14.48 36.58,14.48 30.99,15.24 34.04,15.49 34.04,13.21 44.2,10.92 44.45,13.46 46.48,16 45.97,12.45 46.74,9.65 49.02,7.37 45.47,5.84 46.99,2.54 51.05,6.1 45.72,1.78 28.96,1.02 31.5,9.14 25.91,9.4 35.31,9.65 36.58,8.89 36.58,13.46 47.5,6.86 30.73,17.27 30.23,21.84 28.7,18.8 28.45,21.84 27.94,23.37 29.72,25.15 29.97,29.46 29.72,34.54 27.43,33.53 27.18,30.23 21.34,30.73 15.49,30.99 18.8,31.24 23.62,34.54 23.88,27.18 18.03,28.19 12.7,37.08 21.84,33.53 26.67,38.1 28.19,39.62 32.51,38.1 43.94,24.64 45.21,22.86 47.5,23.88 46.23,18.29 44.7,17.78 41.15,26.8 44.2,29.46 41.4,30.48 41.4,29.21 42.67,28.7 43.69,26.67 47.5,20.57 37.59,24.38 36.07,24.89 37.59,26.8 35.94,26.73 35.05,32.26 37.08,28.96 11.94,38.61 8.64,46.74 15.49,43.94 18.8,43.94 38.1,44.7 40.39,46.99 47.24,44.45 45.47,44.2 41.91,46.99 42.67,49.78 46.99,46.99 47.5,41.4 47.24,40.13 47.5,38.1 46.48,37.08 46.99,30.23 47.5,32.51 46.48,28.19 46.99,25.15 29.21,12.95 16.83,16.83 17.84,16.83 17.84,17.84 16.83,17.84 15.81,17.84 15.81,16.83 15.81,15.81 16.83,15.81 17.84,15.81 39.62,21.34 38.86,22.1 40.39,22.1 38.86,20.57 40.39,20.57 38.42,36.07 39.43,36.07 40.45,36.07 38.42,34.99 39.43,34.99 40.45,34.99 38.42,33.91 39.43,33.91 40.45,33.91 8.64,7.87 10.16,2.29 24.13,6.1 26.92,26.92 24.13,31.24 13.21,32.77 29.72,32.26 33.53,31.24 29.72,27.18 43.69,38.1 45.21,39.37 44.2,27.94 32.26,25.4 32.45,23.69 44.2,49.78 39.62,44.7 38.61,56.39 42.16,60.96 43.69,60.96 42.93,61.72 44.96,59.44 44.96,57.91 45.72,58.67 42.16,56.39 43.69,56.39 42.93,55.63 30.1,59.94 31.62,59.94 33.15,59.94 30.1,58.29 31.62,58.29 33.15,58.29 30.1,56.64 31.62,56.64 33.15,56.64 22.61,55.37
  pour Bottom (isolate 0.305): 0,86.36 54.61,86.36 54.61,0 0,0
  pour Top: 54.61,86.36 0,86.36 0,0.02 5.2,0 16,0 16,12.45 19.56,12.45 19.6,0 38.1,0 38.1,9.65 38.86,10.41 38.86,12.83 38.35,13.46 38.35,18.54 37.85,18.54 37.85,32.77 40.89,32.77 40.89,18.8 41.66,18.8 41.66,17.08 41.08,16.51 41.08,15.24 41.15,15.18 41.91,14.48 41.91,0 54.61,0 54.61,56.9 34.8,56.9 34.8,60.45 54.61,60.45
  pour GND: 0,0 54.61,0 54.61,86.36 0,86.36
  pour Top: 19.3,11.94 19.3,3.05 16.26,3.05 16.26,11.94 14.48,11.94 14.48,0 21.08,0 21.08,11.94
  pour Top: 36.32,0 36.32,18.54 38.73,18.54 38.73,13.21 38.99,12.95 38.99,10.35 38.35,9.78 38.35,0
  pour Top: 41.4,0 41.4,14.67 40.89,15.24 40.89,16.51 41.47,17.08 41.47,18.8 45.47,18.8 45.47,0
  pour Top: 38.1,0 41.91,0 41.91,3.05 38.1,3.05
  pour Top: 36.83,19.05 41.91,19.05 41.91,20.83 36.83,20.83
  pour Top: 38.16,22.61 38.16,32 36.83,32 36.83,22.61 38.1,22.61
  pour Top: 40.7,32 40.7,22.61 41.91,22.61 41.91,32
  pour Top: 16,0 16,2.79 19.56,2.79 19.56,0
  pour Top: 54.61,60.71 34.8,60.71 34.8,60.2 44.45,60.2 44.45,57.15 34.8,57.15 34.8,56.64 54.61,56.64
LED0  (via drill 0.41)
  Top 0.406: v41.66,72.14 41.66,73.39 R1.1
  Bottom 0.406: v41.66,72.14 41.66,71.88 48.77,64.77 48.77,44.58 P9/P8.P8_19
LED1  (via drill 0.41)
  Top 0.406: R2.1 46.72,72.15 v46.74,72.14
  Bottom 0.406: v46.74,72.14 46.74,72.01 51.44,67.31 51.44,46.99 P9/P8.P8_17
LED2
  Top 0.406: R3.1 51.8,72.15 51.82,72.14 51.82,68.83 53.85,66.8 53.85,46.86 P9/P8.P8_18
MISO  (via drill 0.41)
  Top 0.203: U1.1 18.33,21.28 R16.2 17.02,21.34 9.4,28.96 v9.4,39.62 | 43.43,42.02 R17.2 43.18,42.05 | 43.18,42.05 43.18,42.16 | U2.1 40.93,38.39 v42.93,40.39 43.18,40.64 43.18,42.05 | v11.18,42.16 11.68,42.67 11.68,46.23 19.3,53.85 29.46,53.85 30.14,54.53 U6.15
  Bottom 0.203: v42.93,40.39 40.89,42.42 11.43,42.42 v11.18,42.16 9.4,40.39 | 9.4,40.39 6.6,40.39 5.08,41.91 3.17,41.91 P9/P8.P9_21 | v9.4,39.62 9.4,40.39
MOSI  (via drill 0.41)
  Top 0.203: U1.2 17.83,20.02 8.89,28.96 8.89,39.12 7.87,40.13 7.87,42.93 v8.64,43.69 | U2.2 40.43,38.65 41.91,40.13 v41.91,42.42 | U6.14 29.74,54.63 29.46,54.36 19.3,54.36 v10.67,45.72
  Bottom 0.203: P9/P8.P9_18 6.6,45.72 v8.64,43.69 | v8.64,43.69 9.4,42.93 41.4,42.93 v41.91,42.42 | v10.67,45.72 v8.64,43.69
N$1
  Top 0.406: 42.91,73.43 R1.2 42.94,76.2 D1.C
N$2
  Top 0.406: 47.99,73.43 R2.2 48.02,76.2 D2.C
N$3
  Top 0.406: 53.07,73.43 R3.2 53.1,76.2 D3.C
N$5  (via drill 0.41)
  Top 0.203: U1.24 23.95,16.33 24.13,16.51
  Top 0.406: U1.26 20.82,17.33 21.59,18.1 22.54,18.1 24.13,16.51 24.13,15.24 23.11,14.22 21.34,14.22 | U1.20 17.83,13.67 18.03,13.46 19.56,13.46 v20.32,14.22 | U1.22 19.23,15.32 v20.32,14.22 | v20.32,14.22 21.34,14.22 | 21.34,14.22 21.48,14.37 C15.1 21.45,14.22 v20.32,14.22 | U1.16 15.83,13.8 15.49,13.46 12.97,13.46 | 12.97,13.46 C14.1 12.84,11.48 C23.1 | U1.11 13.4,16.83 v13.21,17.02 | U1.8 14.43,18.85 v14.22,19.05 14.22,20.57 13.72,21.08 C16.1 12.71,21.57 11.94,22.35 11.26,22.35 L1.1 | U1.14 14.06,15.33 v13.21,14.48 12.97,14.24 12.97,13.46
  Bottom 0.406: v20.32,14.22 20.07,14.48 13.72,14.48 v13.21,14.48 v13.21,17.02 13.21,18.8 13.46,19.05 v14.22,19.05
N$7
  Top 0.356: ANT1.SIGNAL 17.78,11.04 B1.1
N$11
  Top 0.203: U1.13 10.54,15.83 X1.1 10.5,15.07 9.65,14.22 C8.1
N$12
  Top 0.203: U1.27 19.72,17.83 C17.1
N$13
  Top 0.203: U1.12 12.37,16.33 11.68,17.02 11.68,18.03 11.18,18.54 9.86,18.54 X1.3 8.78,17.51 C7.1
N$14
  Top 0.203: U1.23 20.67,15.83 R13.2
N$29
  Top 0.406: R7.1 16.26,76.96 SJ1.1 16.38,78.29 U3.A0
N$30
  Top 0.406: R8.1 14.11,74.42 18.8,74.42 19.43,75.06 SJ1.3 19.43,78.61 17.53,80.52 15.41,80.52 U3.A1
N$31  (via drill 0.41)
  Top 0.203: U3.WP 7.64,80.64 R12.2 6.37,80.66 v6.35,80.64
  Bottom 0.203: v6.35,80.64 WRT.1
N$32  (via drill 0.41)
  Top 0.406: R9.1 18.8,72.39 v19.56,73.15 | v19.56,80.52 19.56,81.03 18.8,81.79 15.43,81.79 U3.A2
  Bottom 0.406: v19.56,73.15 v19.56,80.52
N$36
  Top 0.203: U6.31 35.46,58.49 B2.ANT1
N$37
  Top 0.203: U6.32 35.5,58.89 B2.ANT2
N$38
  Top 0.406: ANT3.SIGNAL B2.SE C35.1
N$39
  Top 0.203: 26.2,58.79 L12.2 26.23,58.79 L13.1
N$40
  Top 0.203: U6.37 33.74,61.68 34.04,61.98 34.54,61.98 35.05,62.48 35.05,63.5 34.8,63.75 | 34.8,63.75 34.52,63.75 X3.1 | 34.8,63.75 34.98,63.93 C30.1
N$41
  Top 0.203: U6.38 33.34,61.91 33.02,62.23 33.02,62.76 X3.3 31.87,62.95 C31.1
N$42
  Top 0.203: U6.39 32.94,61.8 32.51,62.23 30.55,62.23 C32.1
N$43
  Top 0.203: U6.29 35.02,57.69 35.56,57.15 C33.1
N$44
  Top 0.61: U4.4 38.65,25.49 L9.1
N$45
  Top 0.61: U4.2 39.95,25.46 L5.1
N$46
  Top 0.61: L5.2 40.01,27.77 L4.2 40.05,28.73 C6.2
N$47
  Top 0.61: L9.2 38.73,27.77 L3.2 38.69,28.8 C3.2
N$48
  Top 0.203: L10.1 38.26,18.06 L7.1 38.36,18.16 38.86,18.16 39.3,18.6 U4.10
N$49  (via drill 0.41)
  Top 0.203: U4.13 44.68,20.36 C11.1 44.73,20.36 46.19,20.36 v46.23,20.32 | C13.1 42.36,22.31 U4.16 42.63,22.31 42.67,22.35 | v34.76,18.06 L10.2
  Top 0.356: U4.1 40.6,23.77 41.21,24.45 41.72,24.45 C12.1 42.56,24.5 v42.8,24.51 42.66,24.37 C13.1 | v36.07,23.62 35.58,23.62 C25.1
  Top 0.406: C25.1 L11.2
  Bottom 0.356: v42.8,24.51 42.8,24 43.18,23.62
  Bottom 0.406: v46.23,20.32 46.74,20.83 46.74,22.61 45.72,23.62 43.18,23.62 v36.07,23.62 34.76,22.31 v34.76,18.06
N$50
  Top 0.203: L7.2 C5.1
N$51
  Top 0.305: 39.95,18.33 L8.2 39.95,18.4 U4.11
N$52
  Top 0.356: ANT2.SIGNAL 39.88,10.95 C2.1
  Top 0.61: C4.1 L6.1 C2.1 39.94,11.01
N$53
  Top 0.61: 39.94,14.78 C4.2 39.94,14.79 C1.1 39.95,15.89 39.95,16.96 L8.1
N$54
  Top 0.203: R6.2 44.79,21.72 41.69,21.72 U4.15
N$55
  Top 0.203: U4.5 33.97,22.31 R4.1
N$56
  Top 0.203: U4.6 34.5,21.66 R5.1
N$57  (via drill 0.41)
  Top 0.203: U2.24 46.52,34.5 46.74,34.29
  Top 0.406: U2.20 40.43,31.96 40.89,31.5 41.91,31.5 v42.16,31.75 42.67,32.26 | U2.22 42.44,33.5 42.67,33.27 42.67,32.26 | 42.67,32.26 44.31,32.26 C20.1 44.56,32.51 45.97,32.51 46.74,33.27 46.74,34.29 44.96,36.07 43.69,36.07 43.12,35.5 U2.26 | U2.11 35.86,35 v35.56,35.31 | U2.8 37.03,36.88 v36.58,37.34 36.58,38.75 C21.1 36.46,41.4 L2.1 | v36.58,32 36.07,31.5 36.07,30.85 C19.1 35.96,30.28 C24.1 | U2.14 37.03,32.46 v36.58,32 | v36.58,32 37.08,31.5 38.04,31.5 38.43,31.89 U2.16
  Bottom 0.406: v42.16,31.75 41.15,32.77 37.34,32.77 | v36.58,37.34 36.58,35.31 | 36.58,35.31 36.58,33.53 37.34,32.77 | v35.56,35.31 36.58,35.31 | 37.34,32.77 v36.58,32
N$58
  Top 0.203: U2.27 42.46,36 C22.1
N$59
  Top 0.203: U2.13 34.91,34 X2.1 33.58,32.31 32.77,31.5 32.15,31.5 C10.1
N$60
  Top 0.203: U2.12 35.09,34.5 34.29,35.31 32.81,35.31 X2.3 C9.1
N$61
  Top 0.203: U2.23 43.26,34 R14.2
N$62
  Top 0.203: U4.7 34.73,21.01 34.54,20.83 34.54,19.92 R15.1
N$63
  Top 0.406: D4.A 41.51,70.1 R22.1
N$64  (via drill 0.41)
  Top 0.203: v31.75,53.85 U6.19
  Top 0.406: R22.2 v44.2,68.07
  Bottom 0.406: v31.75,53.85 32.26,53.34 46.74,53.34 48.01,54.61 48.01,64.52 44.45,68.07 v44.2,68.07
P03
  Top 0.203: U6.7 20.39,58.09 JP1.1
P04
  Top 0.203: U6.8 18.25,57.69 JP1.2
P05
  Top 0.203: U6.9 18.43,57.29 JP1.4
P06
  Top 0.203: U6.10 20.57,56.89 JP1.3
PAEN  (via drill 0.41)
  Top 0.203: v31.24,27.43 31.24,23.73 R4.2 | U2.4 39.43,39.94 v39.75,40.26
  Bottom 0.203: v31.24,27.43 31.24,35.05 36.45,40.26 v39.75,40.26
RF_N
  Top 0.254: U1.19 17.33,12.8 B1.3
RF_N2
  Top 0.152: U2.19 39.93,30.31
  Top 0.203: 39.93,30.31 C6.1
RF_P
  Top 0.254: U1.17 16.33,12.8 B1.4
RF_P2
  Top 0.152: 38.95,32.6 38.95,30.39 C3.1
  Top 0.203: U2.17 38.95,32.6
SCL  (via drill 0.41)
  Top 0.203: U3.SCL 6.36,81.92 5.59,81.15 5.59,78.23 v6.99,76.83 | R10.1 7.62,72.39 v6.99,73.03
  Bottom 0.203: v6.99,76.83 v6.99,73.03 0.76,66.8 0.76,44.32 P9/P8.P9_19
SCLK  (via drill 0.41)
  Top 0.203: U1.28 19.23,19.48 20.32,20.57 20.32,21.84 20.07,22.1 16.76,22.1 9.91,28.96 9.91,37.08 v10.16,37.34 | U2.28 41.83,38.28 v42.67,39.12 | v12.19,41.4 12.19,46.23 19.3,53.34 29.46,53.34 30.54,54.42 U6.16
  Bottom 0.203: 9.65,38.86 6.22,38.86 P9/P8.P9_22 | v10.16,37.34 10.16,38.35 9.65,38.86 | v42.67,39.12 42.67,39.62 40.39,41.91 12.7,41.91 v12.19,41.4 9.65,38.86
SDA  (via drill 0.41)
  Top 0.203: U3.SDA 6.36,83.19 5.08,81.92 5.08,77.47 6.1,76.45 6.1,74.93 | R11.1 6.35,74.68 6.1,74.93 | v3.05,67.82 3.05,68.07 6.1,71.12 6.1,74.93
  Bottom 0.203: v3.05,67.82 3.05,44.58 P9/P8.P9_20
SFD0
  Top 0.203: U1.5 16.33,20.5 7.37,29.46 7.37,47.88 P9/P8.P9_14
SFD1
  Top 0.203: U2.5 38.93,40.46 46.74,48.26 P9/P8.P8_15
SPIE0
  Top 0.203: U5.11 20.79,36.62 21.59,35.81 26.16,35.81 43.69,53.34 P9/P8.P8_11
SPIE1
  Top 0.203: U5.10 20.68,35.97 21.34,35.31 26.42,35.31 43.18,52.07 51.44,52.07 P9/P8.P8_12
SWDCLK
  Top 0.203: U6.24 33.74,53.38 | 33.74,53.38 R23.1 | 33.74,53.38 33.74,50.51 31.27,48.03 27.94,48.03 27.35,48.62 J1.4
SWDIO
  Top 0.203: J1.2 26.42,49 26.42,51.56 27.18,52.32 31.24,52.32 33.34,54.42 U6.23
VCC  (via drill 0.41)  (1 unrouted)
  Top 0.203: U3.VCC R12.1 | R12.1 7.62,78.49 v7.37,78.23 | R15.2 32.32,19.05 v32.32,17.78 | R19.2 R20.2 23.11,39.23 23.11,40.89 23,41.01 R21.2 23,41.26 23.26,41.26 v24.38,40.13 | R18.2 19.3,41.91 v20.07,41.15 20.07,40.04 U5.16 | U6.1 28.15,60.49 v26.92,61.72 | J1.1 25.55,47.4 25.27,47.12 v22.61,47.12 | U6.12 26.2,56.09 C28.1 C26.1
  Top 0.406: R8.2 R7.2 C18.1 9.79,79.06 U3.VCC | R8.2 R11.2 | R8.2 R9.2 R10.2 9.79,71.23 v9.91,71.12 | L1.2 8.13,22.61 v7.87,22.86 | D1.A 41.16,76.95 v40.64,77.47 | D2.A 46.24,76.95 v45.72,77.47 | D3.A 51.32,76.95 v50.8,77.47 | L11.1 33.34,26.42 v33.34,27.56 | L2.2 34.54,41.4 v34.54,40.13
  pour VCC: 0,0 54.61,0 54.61,86.36 0,86.36
VDD
  Top 0.406: P9/P8.P9_6 P9/P8.P9_5
VDD_PA
  Top 0.203: B2.VCC 36.14,57.67 C34.1 35.69,57.66 35.25,58.09 U6.30

## Text on the board
tPlace: ZigBeag | REVB | N.Jackson | 2014/09/16
tNames: P9 | P8 | GND | GND | 3V3 | 5V | P04 | P03 | SYS_5V | P05 | P06 | !RST0 | SPIE0 | SPIE1 | SFD0 | FIFOP1 | CCA1 | CCA0 | SFD1 | FIFO1 | CS0 | SI | LD1 | LD2 | SCL | SDA | LD0 | SO | SPICL | FIFP0 | !RST1 | FIFO0
tDocu: CE1 | RXD | TXD | SCL | SDA